# Altium PCB Adapter.PcbDoc
Units mm, origin at the board's own origin, x right, y up, seen from the top; angles counter-clockwise.
Board outline 26.7 x 35.5 mm, 2 copper layers (Top Layer, Bottom Layer); 5 components, 14 nets, 60 pads, 0 vias.
Unrouted connection lines stored in the file: 3.
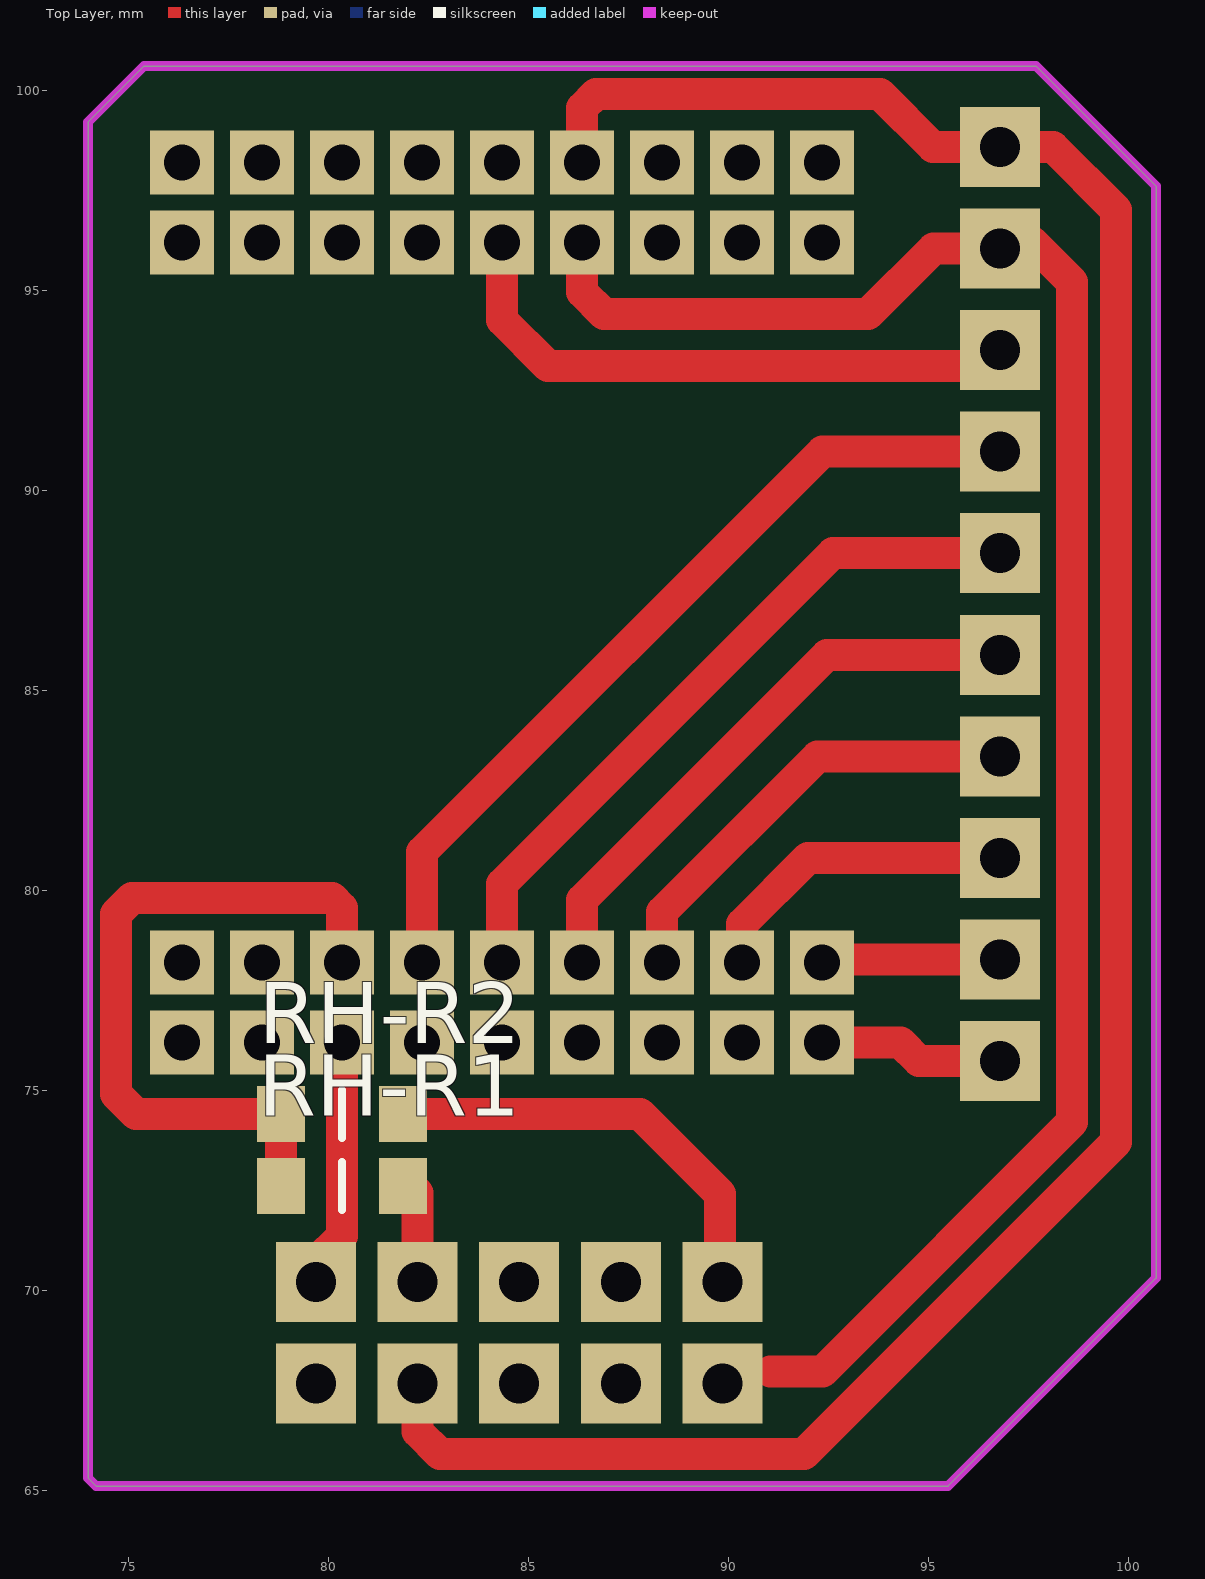
[diagram p0: Top Layer view]
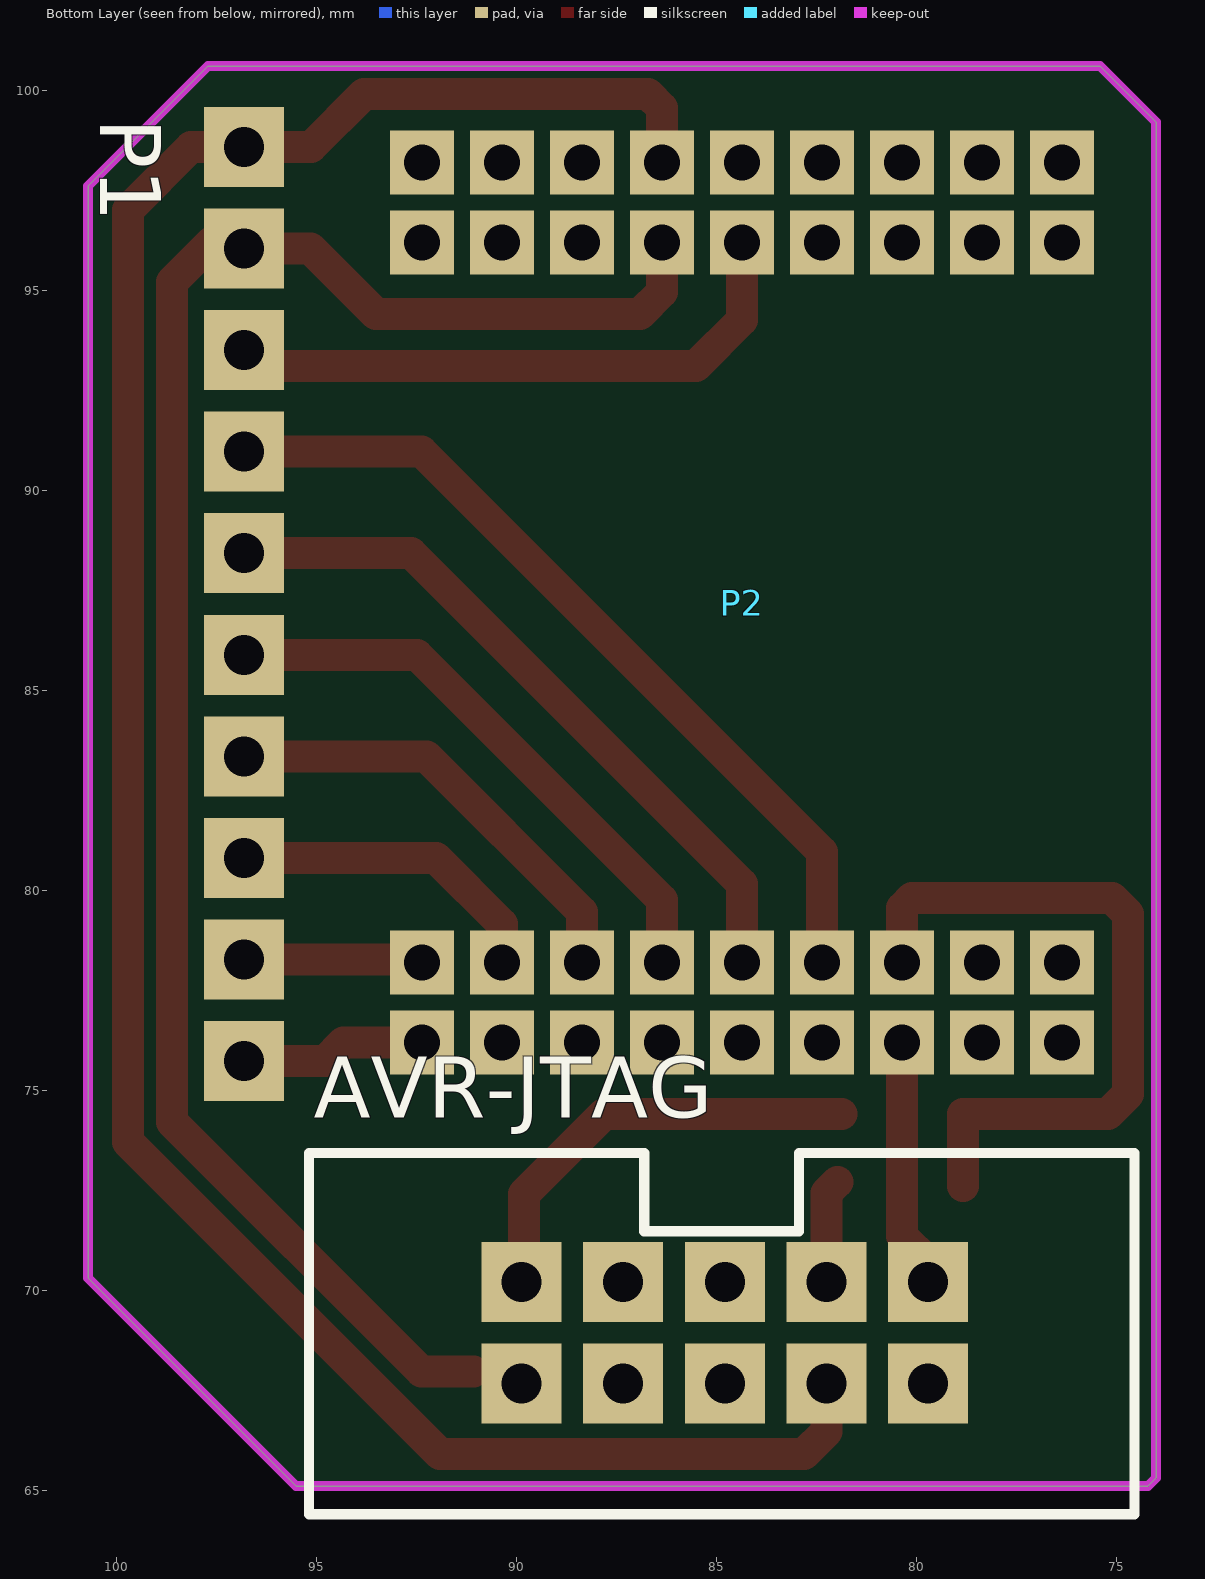
[diagram p1: Bottom Layer view, seen from below]

## Layer stack, top to bottom
Top Solder: solder mask 0.0102, Solder Resist, Dk 3.5
Top Layer: signal copper 0.0356
Dielectric 1: dielectric 0.32, FR-4, Dk 4.8
Bottom Layer: signal copper 0.0356
Bottom Solder: solder mask 0.0102, Solder Resist, Dk 3.5

## Board outline
74,65.3 74.2,65.1 95.5,65.1 100.7,70.3 100.7,97.6 97.7,100.6 75.4,100.6 74,99.2

## Design rules (kind name [scope] priority, off if disabled: settings)
Clearance [All] p1 off: gap=0.254
ComponentClearance [All] p1 off: gap=0.254 collisioncheckmode=3 verticalgap=0.254 showdistances=FALSE
PlaneClearance [All] p1 off: clearance=0.508
PolygonConnect [All] p1: connectstyle=Relief reliefconductorwidth=0.254 reliefentries=4 polygonreliefangle="90 Angle" airgapwidth=0.254
RoutingVias [All] p1: holewidth=0.711 width=1.27 viastyle="Through Hole" minholewidth=0.711 minwidth=1.27 maxholewidth=0.711 maxwidth=1.27
SolderMaskExpansion [All] p1: expansion=0.102
Width [All] p1 off: maxlimit=0.254 minlimit=0.254 preferedwidth=0.254
28 further rules are at their usual default settings.

## Components (designator, comment, footprint, x,y, rotation, side; value= is the part's Value field where it differs from the comment)
AVR-JTAG "AVR Style" "Header 2x5 IDC-10S" 79.7,70.2 r270 bottom
P1 "Header 1x10" "Header 1x10 male" 96.8,93.5 r270 bottom
P2 "Core51822" Core51822 93.345,99.187 r270 bottom
RH-R1 "390R" "R 0805 / 2012 wide" 80.345,72.6 r180 top
RH-R2 "390R" "R 0805 / 2012 wide" 80.345,74.4 r180 top

## Footprints (in the part's own frame and the unit in brackets; to place one, negate y for a bottom-side part, rotate by r counter-clockwise, add the part's x,y. Pads: shape width x height; smd on the part's side, far side on the other; paste and mask are expansions set on the pad)
Core51822 [mm]
  rect 1.6x1.6 hole 0.9: 1(1,17) 2(3,17) 3(1,15) 4(3,15) 5(1,13) 6(3,13) 7(1,11) 8(3,11) 9(1,9) 10(3,9) 11(1,7) 12(3,7) 13(1,5) 14(3,5) 15(1,3) 16(3,3) 17(1,1) 18(3,1) 19(21,17) 20(23,17) 21(21,15) 22(23,15) 23(21,13) 24(23,13) 25(21,11) 26(23,11) 27(21,9) 28(23,9) 29(21,7) 30(23,7) 31(21,5) 32(23,5) 33(21,3) 34(23,3) 35(21,1) 36(23,1)
"Header 1x10 male" [mm] "2.54mm"
  rect 2x2 hole 1: 1(-5.08,0) 2(-2.54,0) 3(0,0) 4(2.54,0) 5(5.08,0) 6(7.62,0) 7(10.16,0) 8(12.7,0) 9(15.24,0) 10(17.78,0)
  body extent -6.35,-1.27 19.05,1.27, height 8.6
"Header 2x5 IDC-10S" [mm]
  rect 2x2 hole 1: 1(0,0) 2(2.54,0) 3(0,-2.54) 4(2.54,-2.54) 5(0,-5.08) 6(2.54,-5.08) 7(0,-7.62) 8(2.54,-7.62) 9(0,-10.16) 10(2.54,-10.16)
  silkscreen extent -3.22,-15.48 5.8,5.16, body extent -3.23,-15.46 5.87,5.14, height 9.3
"R 0805 / 2012 wide" [mm] "Resistor 0805 / 2012 (2.0 x 1.2 mm)"
  rect 1.2x1.4 smd: 1(-1.524,0) 2(1.524,0)
  silkscreen extent 0,-0.6 0,0.6, body extent -1,-0.62 1,0.62, height 0.45

## Part data
AVR-JTAG: library part "Header JTAG AVR"
P2: library part Core51822_2
RH-R1 RH-R2: library part Resistor

## Nets (pads, with @x,y where several pads share a name; then routed paths per layer and width w, separated by ;. In a path a pad name is that pad's centre, name@x,y a point inside that pad or via, vN(x,y) a via of type N, cw(c..) or ccw(c..) an arc to the next point about the centre after c; other vN are vias at no path point)
3V3: AVR-JTAG.4 AVR-JTAG.7 P1.1 P2.11 | length 61.5
  Top Layer w0.8: AVR-JTAG.4 82.24,66.46 82.8,65.9 91.9,65.9 99.7,73.7 99.7,97 98.12,98.58 P1.1 95.12,98.58 93.8,99.9 86.7,99.9 86.345,99.545 P2.11
GND: AVR-JTAG.2 AVR-JTAG.10 P1.2 P2.1 P2.12 | length 45.1
  Top Layer w0.8: P2.12 86.345,94.955 86.9,94.4 93.5,94.4 95.14,96.04 P1.2 ; 91.06,67.96 92.36,67.96 98.6,74.2 98.6,95.2 P1.2@97.6,96.2
NetP1_3: P1.3 P2.10 | length 15
  Top Layer w0.8: P2.10 84.345,94.255 85.5,93.1 96.4,93.1 P1.3
NetP1_4: P1.4 P2.25 | length 21.4
  Top Layer w0.8: P2.25 82.345,80.945 92.36,90.96 P1.4
NetP1_5: P1.5 P2.27 | length 17.8
  Top Layer w0.8: P2.27 84.345,80.145 92.62,88.42 P1.5
NetP1_6: P1.6 P2.29 | length 14.6
  Top Layer w0.8: P2.29 86.345,79.745 92.48,85.88 P1.6
NetP1_7: P1.7 P2.31 | length 11.3
  Top Layer w0.8: P2.31 88.345,79.445 92.24,83.34 P1.7
NetP1_8: P1.8 P2.33 | length 8.1
  Top Layer w0.8: P2.33 90.345,79.145 92,80.8 P1.8
NetP1_9: P1.9 P2.35 | length 4.4
  Top Layer w0.8: P2.35@92.418,78.26 P1.9
NetP1_10: P1.10 P2.36 | length 4.6
  Top Layer w0.8: P2.36 94.313,76.187 94.78,75.72 P1.10
SWDIO: P2.23 RH-R1.2 RH-R2.2 | length 17.9
  Top Layer w0.8: RH-R1.2 RH-R2.2 75.2,74.4 74.7,74.9 74.7,79.4 75.1,79.8 80.1,79.8 80.345,79.555 P2.23
TCK: AVR-JTAG.1 P2.24 | length 5.8
  Top Layer w0.8: AVR-JTAG.1@79.7,70.7 80.345,71.345 P2.24
TDI: AVR-JTAG.9 RH-R2.1 | length 11
  Top Layer w0.8: RH-R2.1 87.8,74.4 89.8,72.4 AVR-JTAG.9@89.8,70.2
TDO: AVR-JTAG.3 RH-R1.1 | length 2.6
  Top Layer w0.8: RH-R1.1@81.969,72.7 82.24,72.429 AVR-JTAG.3
pads on no net: AVR-JTAG.5 AVR-JTAG.6 AVR-JTAG.8 P2.2 P2.3 P2.4 P2.5 P2.6 P2.7 P2.8 P2.9 P2.13 P2.14 P2.15 P2.16 P2.17 P2.18 P2.19 P2.20 P2.21 P2.22 P2.26 P2.28 P2.30 P2.32 P2.34

## Keep-outs
Keep-Out Layer:
  the board outline again, w0.254